# Altium PCB Microneedle_Patch.PcbDoc
Units mil, origin at the board's own origin, x right, y up, seen from the top; angles counter-clockwise.
Board outline 1137.8 x 3681.1 mil, 2 copper layers (Top, Bottom), stack 5.394 mil thick; 33 components, 33 nets, 452 pads, 0 vias.
Unrouted connection lines stored in the file: 51.
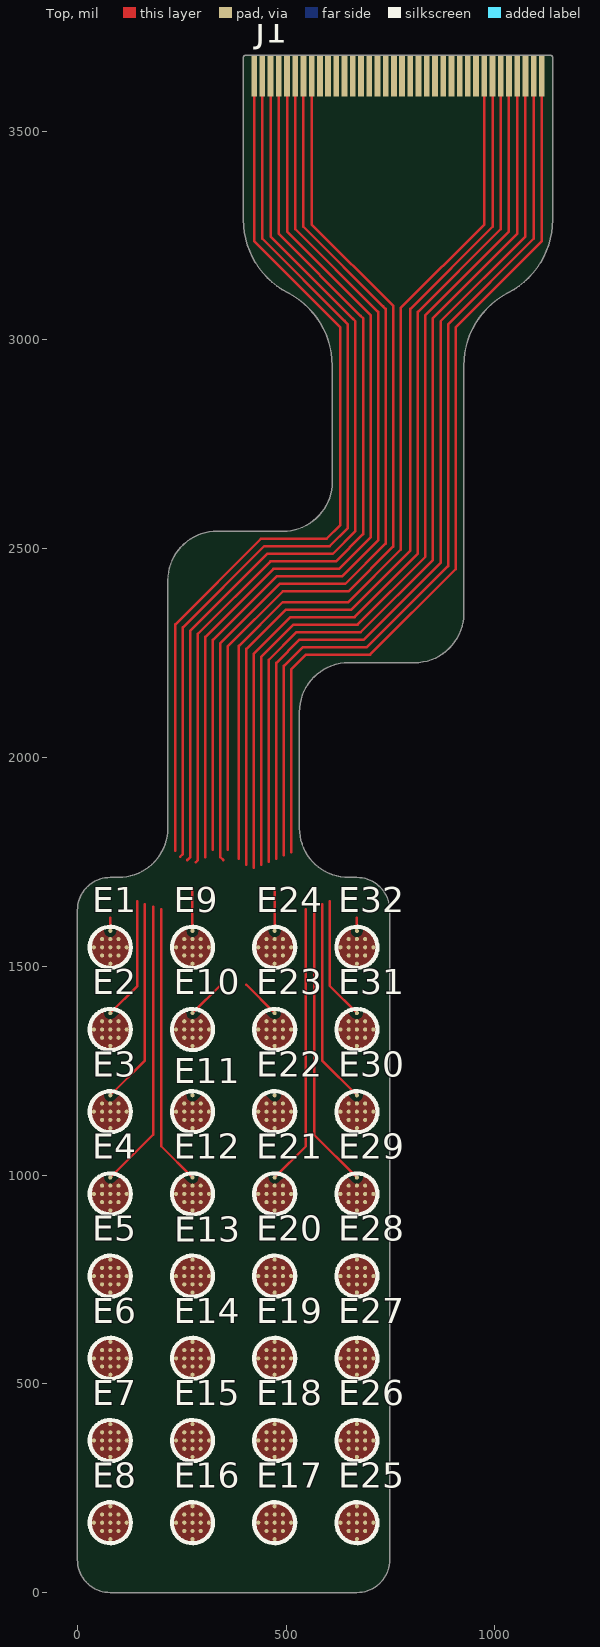
[diagram p0: Top view]
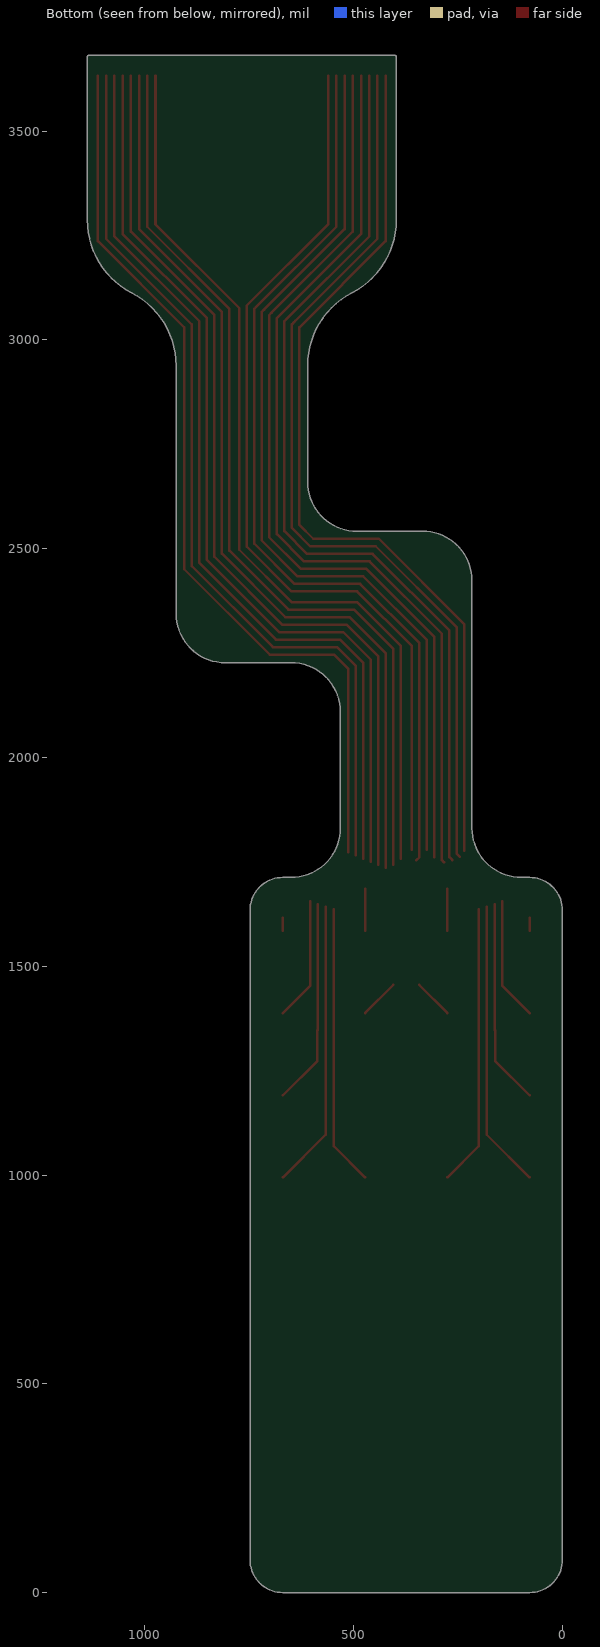
[diagram p1: Bottom view, seen from below]

## Layer stack, top to bottom
Board Layer Stack Top Coverlay: solder mask 0.9843, Polymide, Dk 3.4
Dielectric 4: prepreg 0.9843, Adhesive, Dk 3.3
Top: signal copper 0.7087
Dielectric 1: core 0.5118, Composite dielectric, Dk 3.3
Dielectric 3: core 0.9843, Composite dielectric, Dk 3.3
Dielectric 2: core 0.5118, Composite dielectric, Dk 3.3
Bottom: signal copper 0.7087
Dielectric 5: prepreg 0.9843, Adhesive, Dk 3.3
Board Layer Stack Bottom Coverlay: solder mask 0.9843, Polymide, Dk 3.4

## Board outline
78.74,0 cw(c78.74,78.74) 0,78.74 0,1633.86 cw(c78.74,1633.86) 78.74,1712.6 98.43,1712.6 ccw(c98.43,1830.71) 216.54,1830.71 216.54,2423.64 cw(c334.65,2423.64) 334.65,2541.75 492.13,2541.75 ccw(c492.13,2659.86) 610.24,2659.86 610.24,2937.83 ccw(c413.39,2937.83) 503.94,3112.61 cw(c594.49,3287.4) 397.64,3287.4 397.64,3677.17 cw(c401.57,3677.17) 401.57,3681.1 1133.86,3681.1 cw(c1133.86,3677.17) 1137.8,3677.17 1137.8,3287.4 cw(c940.94,3287.4) 1031.5,3112.61 ccw(c1122.05,2937.83) 925.2,2937.83 925.2,2344.9 cw(c807.09,2344.9) 807.09,2226.79 649.61,2226.79 ccw(c649.61,2108.68) 531.5,2108.68 531.5,1830.71 ccw(c649.61,1830.71) 649.61,1712.6 669.29,1712.6 cw(c669.29,1633.86) 748.03,1633.86 748.03,78.74 cw(c669.29,78.74) 669.29,0

## Design rules (kind name [scope] priority, off if disabled: settings)
BoardOutlineClearance [All] p1: gap=15 ignorepadtopadclearanceinfootprint=FALSE
Clearance [All] p1: gap=12 ignorepadtopadclearanceinfootprint=TRUE except(5: Arc-SMDPad Track-SMDPad SMDPad-SMDPad)
ComponentClearance [All] p1: gap=4 collisioncheckmode=3 verticalgap=4 showdistances=FALSE
HoleSize [All] p1: absolutevalues=TRUE maxlimit=1000 minlimit=4 maxpercent=80.000 minpercent=20.000
HoleToHoleClearance [All] p1: gap=10 allowstackedmicrovias=FALSE
MinimumSolderMaskSliver [All] p1: minsoldermaskwidth=4
PlaneClearance [All] p1: clearance=6
PlaneConnect [All] p1: pad.planeconnectstyle=Relief pad.reliefexpansion=20 pad.reliefentries=4 pad.reliefconductorwidth=10 pad.reliefairgap=10 via.planeconnectstyle=Direct via.reliefexpansion=20 via.reliefentries=4 via.reliefconductorwidth=10 via.reliefairgap=10
PolygonConnect [All] p1: thpad.connectstyle=Relief thpad.reliefconductorwidth=10 thpad.reliefentries=4 thpad.polygonreliefangle="90 Angle" thpad.airgapwidth=10 smdpad.connectstyle=Direct smdpad.reliefconductorwidth=10 smdpad.reliefentries=4 smdpad.polygonreliefangle="90 Angle" smdpad.airgapwidth=10 via.connectstyle=Direct via.reliefconductorwidth=10 via.reliefentries=4 via.polygonreliefangle="90 Angle" via.airgapwidth=10
RoutingVias [All] p1: holewidth=6 width=18 viastyle="Through Hole" minholewidth=6 minwidth=18 maxholewidth=6 maxwidth=18
SilkToSilkClearance [All] p1: silktosilkclearance=4
SilkToSolderMaskClearance [IsPad] p1: minsilkscreentomaskgap=2 clearancetoexposedcopper=FALSE
SolderMaskExpansion [All] p1: expansion=2 istentingtop=FALSE
SupplyNets "Schematic Supply Nets" [InNet('GND')] p1: voltage=0.000
Width [All] p1: maxlimit=6 minlimit=6 preferedwidth=6 minimp=50.000000 maximp=50.000000 favimp=50.000000
22 further rules are at their usual default settings.

## Classes and differential pairs
net class Signals: Input1 Input2 Input3 Input4 Input5 Input6 Input7 Input8 Input9 Input10 Input11 Input12 Input13 Input14 Input15 Input16 Input17 Input18 Input19 Input20 Input21 Input22 Input23 Input24 Input25 Input26 Input27 Input28 Input29 Input30 Input31 Input32

## Components (designator, comment, footprint, x,y, rotation, side; value= is the part's Value field where it differs from the comment)
E1 "2.5 mm" PCBComponent_1 78.74,1545.28 r0 top
E2 "2.5 mm" PCBComponent_1 78.74,1348.43 r0 top
E3 "2.5 mm" PCBComponent_1 78.74,1151.57 r0 top
E4 "2.5 mm" PCBComponent_1 78.74,954.72 r0 top
E5 "2.5 mm" PCBComponent_1 78.74,757.87 r0 top
E6 "2.5 mm" PCBComponent_1 78.74,561.02 r0 top
E7 "2.5 mm" PCBComponent_1 78.74,364.17 r0 top
E8 "2.5 mm" PCBComponent_1 78.74,167.32 r0 top
E9 "2.5 mm" PCBComponent_1 275.59,1545.28 r0 top
E10 "2.5 mm" PCBComponent_1 275.59,1348.43 r0 top
E11 "2.5 mm" PCBComponent_1 275.59,1151.57 r0 top
E12 "2.5 mm" PCBComponent_1 275.59,954.72 r0 top
E13 "2.5 mm" PCBComponent_1 275.59,757.87 r0 top
E14 "2.5 mm" PCBComponent_1 275.59,561.02 r0 top
E15 "2.5 mm" PCBComponent_1 275.59,364.17 r0 top
E16 "2.5 mm" PCBComponent_1 275.59,167.32 r0 top
E17 "2.5 mm" PCBComponent_1 472.44,167.32 r0 top
E18 "2.5 mm" PCBComponent_1 472.44,364.17 r0 top
E19 "2.5 mm" PCBComponent_1 472.44,561.02 r0 top
E20 "2.5 mm" PCBComponent_1 472.44,757.87 r0 top
E21 "2.5 mm" PCBComponent_1 472.44,954.72 r0 top
E22 "2.5 mm" PCBComponent_1 472.44,1151.57 r0 top
E23 "2.5 mm" PCBComponent_1 472.44,1348.43 r0 top
E24 "2.5 mm" PCBComponent_1 472.44,1545.28 r0 top
E25 "2.5 mm" PCBComponent_1 669.29,167.32 r0 top
E26 "2.5 mm" PCBComponent_1 669.29,364.17 r0 top
E27 "2.5 mm" PCBComponent_1 669.29,561.02 r0 top
E28 "2.5 mm" PCBComponent_1 669.29,757.87 r0 top
E29 "2.5 mm" PCBComponent_1 669.29,954.72 r0 top
E30 "2.5 mm" PCBComponent_1 669.29,1151.57 r0 top
E31 "2.5 mm" PCBComponent_1 669.29,1348.43 r0 top
E32 "2.5 mm" PCBComponent_1 669.29,1545.28 r0 top
J1 "XF2M-3615-1A" CONN_FPC_2X18_0MM5 767.72,3631.89 r0 top

## Footprints (in the part's own frame and the unit in brackets; to place one, negate y for a bottom-side part, rotate by r counter-clockwise, add the part's x,y. Pads: shape width x height; smd on the part's side, far side on the other; paste and mask are expansions set on the pad)
CONN_FPC_2X18_0MM5 [mm] "Compatible with XF2M-3615-1A / 0.5 mm pitch, 2X18"
  rect 0.35x2.5 smd mask+0: 1(-8.75,0) 2(-8.25,0) 3(-7.75,0) 4(-7.25,0) 5(-6.75,0) 6(-6.25,0) 7(-5.75,0) 8(-5.25,0) 9(-4.75,0) 10(-4.25,0) 11(-3.75,0) 12(-3.25,0) 13(-2.75,0) 14(-2.25,0) 15(-1.75,0) 16(-1.25,0) 17(-0.75,0) 18(-0.25,0) 19(0.25,0) 20(0.75,0) 21(1.25,0) 22(1.75,0) 23(2.25,0) 24(2.75,0) 25(3.25,0) 26(3.75,0) 27(4.25,0) 28(4.75,0) 29(5.25,0) 30(5.75,0) 31(6.25,0) 32(6.75,0) 33(7.25,0) 34(7.75,0) 35(8.25,0) 36(8.75,0)
PCBComponent_1 [mm]
  round 0.25 smd paste+0 mask+0.05: 1(-1,0) 1(-0.5,-0.5) 1(-0.5,0) 1(-0.5,0.5) 1(0,-1) 1(0,-0.5) 1(0,0) 1(0,0.5) 1(0,1) 1(0.5,-0.5) 1(0.5,0) 1(0.5,0.5) 1(1,0)
  silkscreen extent -1.25,-1.25 1.25,1.25

## Part data
E1 E2 E3 E4 E5 E6 E7 E8 E9 E10 E11 E12 E13 E14 E15 E16 E17 E18 E19 E20 E21 E22 E23 E24 E25 E26 E27 E28 E29 E30 E31 E32: library part SENSE_UNEEDLE, "Microneedle electrode - 2.5 mm diameter"
J1: library part CONN_FPC_2X18_0MM5, "FPC Connector - FPC Side. 0.5 mm pitch / Compatible with XF2M-3615-1A", GRAMS Lib Spec=2.7

## Nets (pads, with @x,y where several pads share a name; then routed paths per layer and width w, separated by ;. In a path a pad name is that pad's centre, name@x,y a point inside that pad or via, vN(x,y) a via of type N, cw(c..) or ccw(c..) an arc to the next point about the centre after c; other vN are vias at no path point)
GND: J1.9 J1.18 J1.19 J1.28
Input1: E1.1 J1.1 | length 2228.4
  Top w6: E1.1@78.74,1584.65 78.74,1616.14 ; 234.53,1776.37 234.53,1933.23 234.53,2318.6 439.56,2523.62 596.6,2523.62 629.92,2556.94 629.92,3029.53 423.23,3236.22 J1.1
Input2: E2.1 J1.2 | length 2507.4
  Top w6: E2.1@78.74,1387.8 143.7,1452.76 143.7,1655.65 ; 246.19,1762.57 252.53,1768.91 252.53,2311.14 447.01,2505.62 554.75,2505.62 604.06,2505.62 647.92,2549.48 647.92,2598.79 647.92,3036.98 642.28,3042.62 639.76,3045.14 442.91,3241.99 J1.2
Input3: E3.1 J1.3 | length 2712.2
  Top w6: E3.1@78.74,1190.94 161.13,1273.34 161.13,1346.04 161.7,1346.61 161.7,1648.19 ; 263.44,1754.24 263.44,1754.37 270.53,1761.46 270.53,2303.69 454.47,2487.62 562.21,2487.62 611.51,2487.62 665.92,2542.03 665.92,2591.33 665.92,3044.44 660.28,3050.08 462.6,3247.76 J1.3
Input4: E4.1 J1.4 | length 2915
  Top w6: E4.1@78.74,994.09 181.1,1096.46 181.1,1642.14 ; 283.32,1748.78 288.53,1754 288.53,2296.23 461.92,2469.62 569.66,2469.62 618.97,2469.62 683.92,2534.57 683.92,2583.88 683.92,3051.89 678.28,3057.53 482.28,3253.53 J1.4
Input5: E5.1 J1.5 | length 2209
  Top w6: 306.53,1761.46 306.53,2288.78 469.38,2451.62 577.12,2451.62 626.43,2451.62 701.92,2527.12 701.92,2576.42 701.92,3059.35 696.28,3064.99 501.97,3259.3 J1.5
Input6: E6.1 J1.6 | length 2190.3
  Top w6: 324.53,1779.46 324.53,2281.32 476.84,2433.62 584.58,2433.62 633.88,2433.62 719.92,2519.66 719.92,2568.97 719.92,3066.81 714.28,3072.44 521.65,3265.07 J1.6
Input7: E7.1 J1.7 | length 2218
  Top w6: 349.56,1754 342.53,1761.02 342.53,2273.86 484.29,2415.62 592.03,2415.62 641.34,2415.62 737.92,2512.21 737.92,2561.51 737.92,3074.26 732.28,3079.9 541.34,3270.85 J1.7
Input8: E8.1 J1.8 | length 2188.9
  Top w6: 360.53,1779.46 360.53,2266.41 491.75,2397.62 599.49,2397.62 648.79,2397.62 755.92,2504.75 755.92,2554.06 755.92,3081.72 561.02,3276.62 J1.8
Input9: E9.1 J1.10 | length 101.1
  Top w6: E9.1@275.59,1584.65 275.59,1685.71
Input10: E10.1 J1.11 | length 95.9
  Top w6: E10.1@275.59,1387.8 343.37,1455.57
Input11: E11.1 J1.12
Input12: E12.1 J1.13 | length 673.3
  Top w6: 200.79,1636.37 200.79,1068.9 E12.1@275.59,994.09
Input13: E13.1 J1.14
Input14: E14.1 J1.15
Input15: E15.1 J1.16
Input16: E16.1 J1.17
Input17: E17.1 J1.20
Input18: E18.1 J1.21
Input19: E19.1 J1.22
Input20: E20.1 J1.23
Input21: E21.1 J1.24 | length 673.3
  Top w6: E21.1@472.44,994.09 547.24,1068.9 547.24,1636.37
Input22: E22.1 J1.25
Input23: E23.1 J1.26 | length 95.9
  Top w6: 404.66,1455.57 E23.1@472.44,1387.8
Input24: E24.1 J1.27 | length 101.1
  Top w6: E24.1@472.44,1584.65 472.44,1685.71
Input25: E25.1 J1.29 | length 2209.5
  Top w6: 386.66,1757.86 386.66,2267.08 491.64,2372.06 497.22,2372.06 648.69,2372.06 773.92,2497.29 773.92,3076.13 974.41,3276.62 J1.29
Input26: E26.1 J1.30 | length 2225.1
  Top w6: 404.66,1742.95 404.66,2259.62 499.1,2354.06 656.15,2354.06 797.51,2495.43 797.51,3074.26 994.09,3270.85 J1.30
Input27: E27.1 J1.31 | length 2231.2
  Top w6: 422.66,1735.49 422.66,2248.76 509.97,2336.06 555.24,2336.06 663.6,2336.06 815.51,2487.97 815.51,3066.81 1013.78,3265.07 J1.31
Input28: E28.1 J1.32 | length 2224.5
  Top w6: 440.66,1742.95 440.66,2241.3 517.42,2318.06 562.7,2318.06 671.06,2318.06 833.51,2480.52 833.51,3059.35 1033.46,3259.3 J1.32
Input29: E29.1 J1.33 | length 2908.2
  Top w6: 458.66,1750.4 458.66,2233.85 524.88,2300.06 570.15,2300.06 678.51,2300.06 851.51,2473.06 851.51,3051.89 1053.15,3253.53 J1.33 ; 566.93,1642.14 566.93,1096.46 E29.1@669.29,994.09
Input30: E30.1 J1.34 | length 2702.6
  Top w6: 476.66,1757.86 476.66,2226.39 532.33,2282.06 577.61,2282.06 685.97,2282.06 869.51,2465.61 869.51,3044.44 1072.83,3247.76 J1.34 ; 586.33,1648.19 586.33,1346.61 586.9,1346.04 586.9,1273.34 E30.1@669.29,1190.94
Input31: E31.1 J1.35 | length 2499
  Top w6: 494.66,1765.32 494.66,2218.94 539.79,2264.06 585.06,2264.06 693.43,2264.06 887.51,2458.15 887.51,3036.98 1092.52,3241.99 J1.35 ; 604.33,1655.65 604.33,1452.76 E31.1@669.29,1387.8
Input32: E32.1 J1.36 | length 2229
  Top w6: 512.66,1772.77 512.66,1932.4 512.66,2211.48 547.24,2246.06 700.88,2246.06 905.51,2450.69 905.51,2602.24 905.51,3029.53 1112.2,3236.22 J1.36 ; E32.1@669.29,1584.65 669.29,1616.14

## Polygon pours and split planes (outlines as drawn)
Input11 on Top "Electrode11" (solid, pour order 10): 275.59,1200.79 cw(c275.59,1151.57) 324.8,1151.57 cw(c275.59,1151.57) 275.59,1102.36 cw(c275.59,1151.57) 226.38,1151.57 cw(c275.59,1151.57)
Input22 on Top "Electrode22" (solid, pour order 11): 472.44,1200.79 cw(c472.44,1151.57) 521.65,1151.57 cw(c472.44,1151.57) 472.44,1102.36 cw(c472.44,1151.57) 423.23,1151.57 cw(c472.44,1151.57)
Input24 on Top "Electrode24" (solid, pour order 2): 472.44,1594.49 cw(c472.44,1545.28) 521.65,1545.28 cw(c472.44,1545.28) 472.44,1496.06 cw(c472.44,1545.28) 423.23,1545.28 cw(c472.44,1545.28)
Input23 on Top "Electrode23" (solid, pour order 6): 472.44,1397.64 cw(c472.44,1348.43) 521.65,1348.43 cw(c472.44,1348.43) 472.44,1299.21 cw(c472.44,1348.43) 423.23,1348.43 cw(c472.44,1348.43)
Input4 on Top "Electrode4" (solid, pour order 16): 78.74,1003.94 cw(c78.74,954.72) 127.95,954.72 cw(c78.74,954.72) 78.74,905.51 cw(c78.74,954.72) 29.53,954.72 cw(c78.74,954.72)
Input12 on Top "Electrode12" (solid, pour order 15): 275.59,1003.94 cw(c275.59,954.72) 324.8,954.72 cw(c275.59,954.72) 275.59,905.51 cw(c275.59,954.72) 226.38,954.72 cw(c275.59,954.72)
Input3 on Top "Electrode3" (solid, pour order 9): 78.74,1200.79 cw(c78.74,1151.57) 127.95,1151.57 cw(c78.74,1151.57) 78.74,1102.36 cw(c78.74,1151.57) 29.53,1151.57 cw(c78.74,1151.57)
Input2 on Top "Electrode2" (solid, pour order 8): 78.74,1397.64 cw(c78.74,1348.43) 127.95,1348.43 cw(c78.74,1348.43) 78.74,1299.21 cw(c78.74,1348.43) 29.53,1348.43 cw(c78.74,1348.43)
Input10 on Top "Electrode10" (solid, pour order 7): 275.59,1397.64 cw(c275.59,1348.43) 324.8,1348.43 cw(c275.59,1348.43) 275.59,1299.21 cw(c275.59,1348.43) 226.38,1348.43 cw(c275.59,1348.43)
Input1 on Top "Electrode1" (solid, pour order 4): 78.74,1594.49 cw(c78.74,1545.28) 127.95,1545.28 cw(c78.74,1545.28) 78.74,1496.06 cw(c78.74,1545.28) 29.53,1545.28 cw(c78.74,1545.28)
Input9 on Top "Electrode9" (solid, pour order 3): 275.59,1594.49 cw(c275.59,1545.28) 324.8,1545.28 cw(c275.59,1545.28) 275.59,1496.06 cw(c275.59,1545.28) 226.38,1545.28 cw(c275.59,1545.28)
Input21 on Top "Electrode21" (solid, pour order 14): 472.44,1003.94 cw(c472.44,954.72) 521.65,954.72 cw(c472.44,954.72) 472.44,905.51 cw(c472.44,954.72) 423.23,954.72 cw(c472.44,954.72)
Input29 on Top "Electrode29" (solid, pour order 13): 669.29,1003.94 cw(c669.29,954.72) 718.5,954.72 cw(c669.29,954.72) 669.29,905.51 cw(c669.29,954.72) 620.08,954.72 cw(c669.29,954.72)
Input30 on Top "Electrode30" (solid, pour order 12): 669.29,1200.79 cw(c669.29,1151.57) 718.5,1151.57 cw(c669.29,1151.57) 669.29,1102.36 cw(c669.29,1151.57) 620.08,1151.57 cw(c669.29,1151.57)
Input31 on Top "Electrode31" (solid, pour order 5): 669.29,1397.64 cw(c669.29,1348.43) 718.5,1348.43 cw(c669.29,1348.43) 669.29,1299.21 cw(c669.29,1348.43) 620.08,1348.43 cw(c669.29,1348.43)
Input32 on Top "Electrode32" (solid, pour order 0): 669.29,1594.49 cw(c669.29,1545.28) 718.5,1545.28 cw(c669.29,1545.28) 669.29,1496.06 cw(c669.29,1545.28) 620.08,1545.28 cw(c669.29,1545.28)
Input13 on Top "Electrode13" (solid, pour order 18): 275.59,807.09 cw(c275.59,757.87) 324.8,757.87 cw(c275.59,757.87) 275.59,708.66 cw(c275.59,757.87) 226.38,757.87 cw(c275.59,757.87)
Input8 on Top "Electrode8" (solid, pour order 32): 78.74,216.54 cw(c78.74,167.32) 127.95,167.32 cw(c78.74,167.32) 78.74,118.11 cw(c78.74,167.32) 29.53,167.32 cw(c78.74,167.32)
Input15 on Top "Electrode15" (solid, pour order 26): 275.59,413.39 cw(c275.59,364.17) 324.8,364.17 cw(c275.59,364.17) 275.59,314.96 cw(c275.59,364.17) 226.38,364.17 cw(c275.59,364.17)
Input7 on Top "Electrode7" (solid, pour order 25): 78.74,413.39 cw(c78.74,364.17) 127.95,364.17 cw(c78.74,364.17) 78.74,314.96 cw(c78.74,364.17) 29.53,364.17 cw(c78.74,364.17)
Input6 on Top "Electrode6" (solid, pour order 24): 78.74,610.24 cw(c78.74,561.02) 127.95,561.02 cw(c78.74,561.02) 78.74,511.81 cw(c78.74,561.02) 29.53,561.02 cw(c78.74,561.02)
Input14 on Top "Electrode14" (solid, pour order 23): 275.59,610.24 cw(c275.59,561.02) 324.8,561.02 cw(c275.59,561.02) 275.59,511.81 cw(c275.59,561.02) 226.38,561.02 cw(c275.59,561.02)
Input5 on Top "Electrode5" (solid, pour order 17): 78.74,807.09 cw(c78.74,757.87) 127.95,757.87 cw(c78.74,757.87) 78.74,708.66 cw(c78.74,757.87) 29.53,757.87 cw(c78.74,757.87)
Input16 on Top "Electrode16" (solid, pour order 31): 275.59,216.54 cw(c275.59,167.32) 324.8,167.32 cw(c275.59,167.32) 275.59,118.11 cw(c275.59,167.32) 226.38,167.32 cw(c275.59,167.32)
Input28 on Top "Electrode28" (solid, pour order 20): 669.29,807.09 cw(c669.29,757.87) 718.5,757.87 cw(c669.29,757.87) 669.29,708.66 cw(c669.29,757.87) 620.08,757.87 cw(c669.29,757.87)
Input20 on Top "Electrode20" (solid, pour order 19): 472.44,807.09 cw(c472.44,757.87) 521.65,757.87 cw(c472.44,757.87) 472.44,708.66 cw(c472.44,757.87) 423.23,757.87 cw(c472.44,757.87)
Input19 on Top "Electrode19" (solid, pour order 22): 472.44,610.24 cw(c472.44,561.02) 521.65,561.02 cw(c472.44,561.02) 472.44,511.81 cw(c472.44,561.02) 423.23,561.02 cw(c472.44,561.02)
Input27 on Top "Electrode27" (solid, pour order 21): 669.29,610.24 cw(c669.29,561.02) 718.5,561.02 cw(c669.29,561.02) 669.29,511.81 cw(c669.29,561.02) 620.08,561.02 cw(c669.29,561.02)
Input26 on Top "Electrode26" (solid, pour order 28): 669.29,413.39 cw(c669.29,364.17) 718.5,364.17 cw(c669.29,364.17) 669.29,314.96 cw(c669.29,364.17) 620.08,364.17 cw(c669.29,364.17)
Input18 on Top "Electrode18" (solid, pour order 27): 472.44,413.39 cw(c472.44,364.17) 521.65,364.17 cw(c472.44,364.17) 472.44,314.96 cw(c472.44,364.17) 423.23,364.17 cw(c472.44,364.17)
Input17 on Top "Electrode17" (solid, pour order 30): 472.44,216.54 cw(c472.44,167.32) 521.65,167.32 cw(c472.44,167.32) 472.44,118.11 cw(c472.44,167.32) 423.23,167.32 cw(c472.44,167.32)
Input25 on Top "Electrode25" (solid, pour order 29): 669.29,216.54 cw(c669.29,167.32) 718.5,167.32 cw(c669.29,167.32) 669.29,118.11 cw(c669.29,167.32) 620.08,167.32 cw(c669.29,167.32)

## Silkscreen, mask and mechanical layers (free items; w line width, h text height)
Top Assembly:
  lines w10: 397.64,3503.94 1137.8,3503.94 1137.8,3681.1 397.64,3681.1 397.64,3503.94
Board Outline:
  the board outline again, w7.87
Board Shape:
  the board outline again, w7.87